# EAGLE board Nano Wearable (EAGLE 5.11)
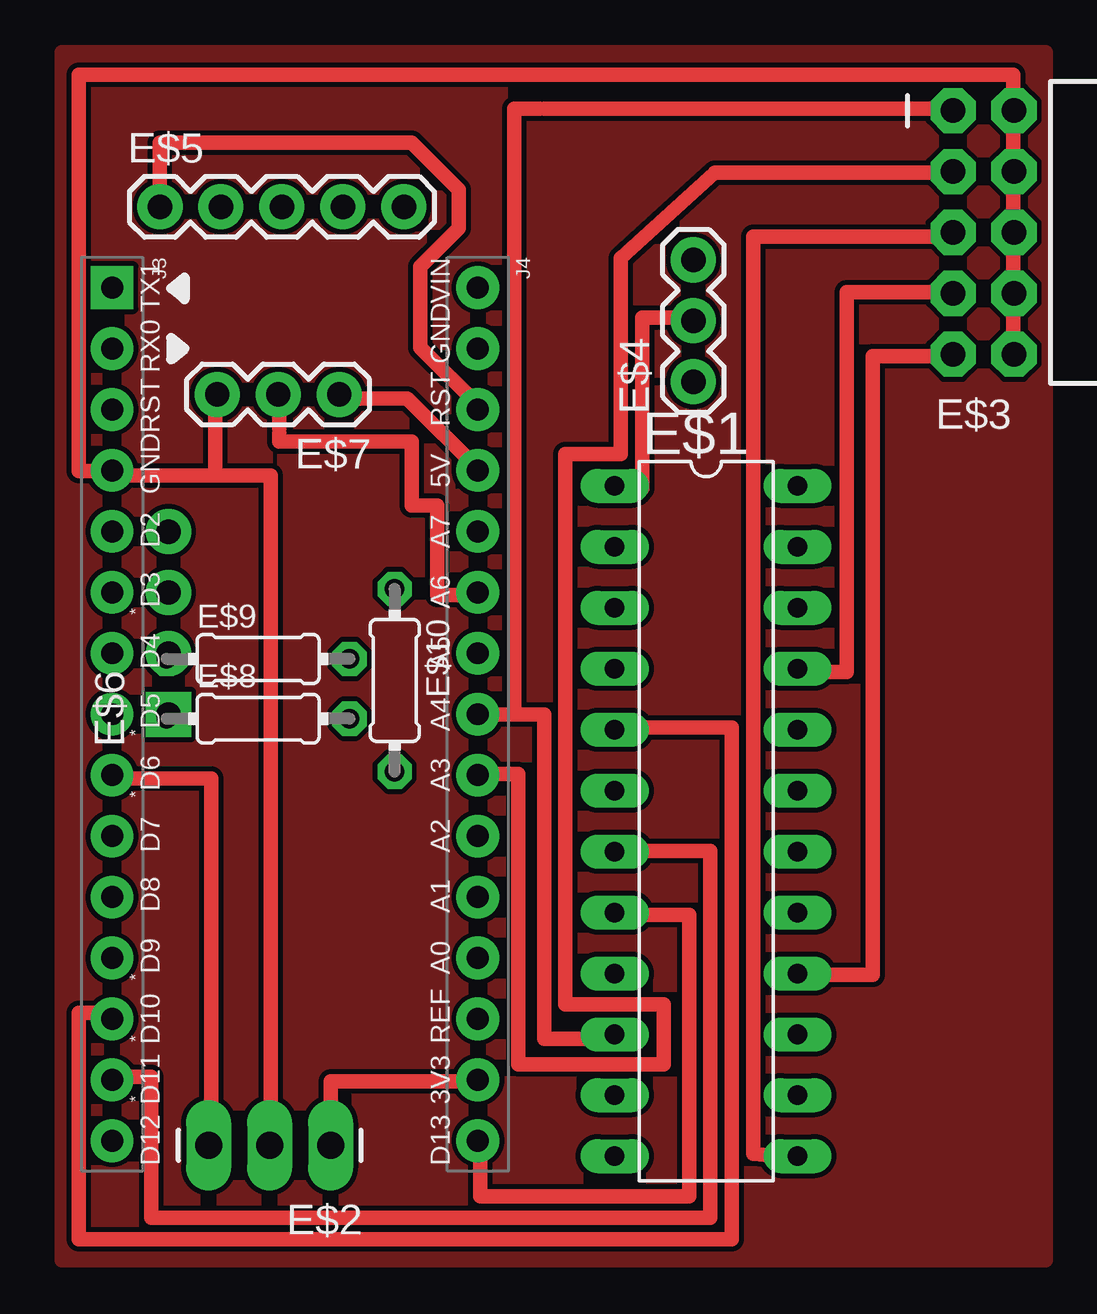
[diagram p0: board, top side]
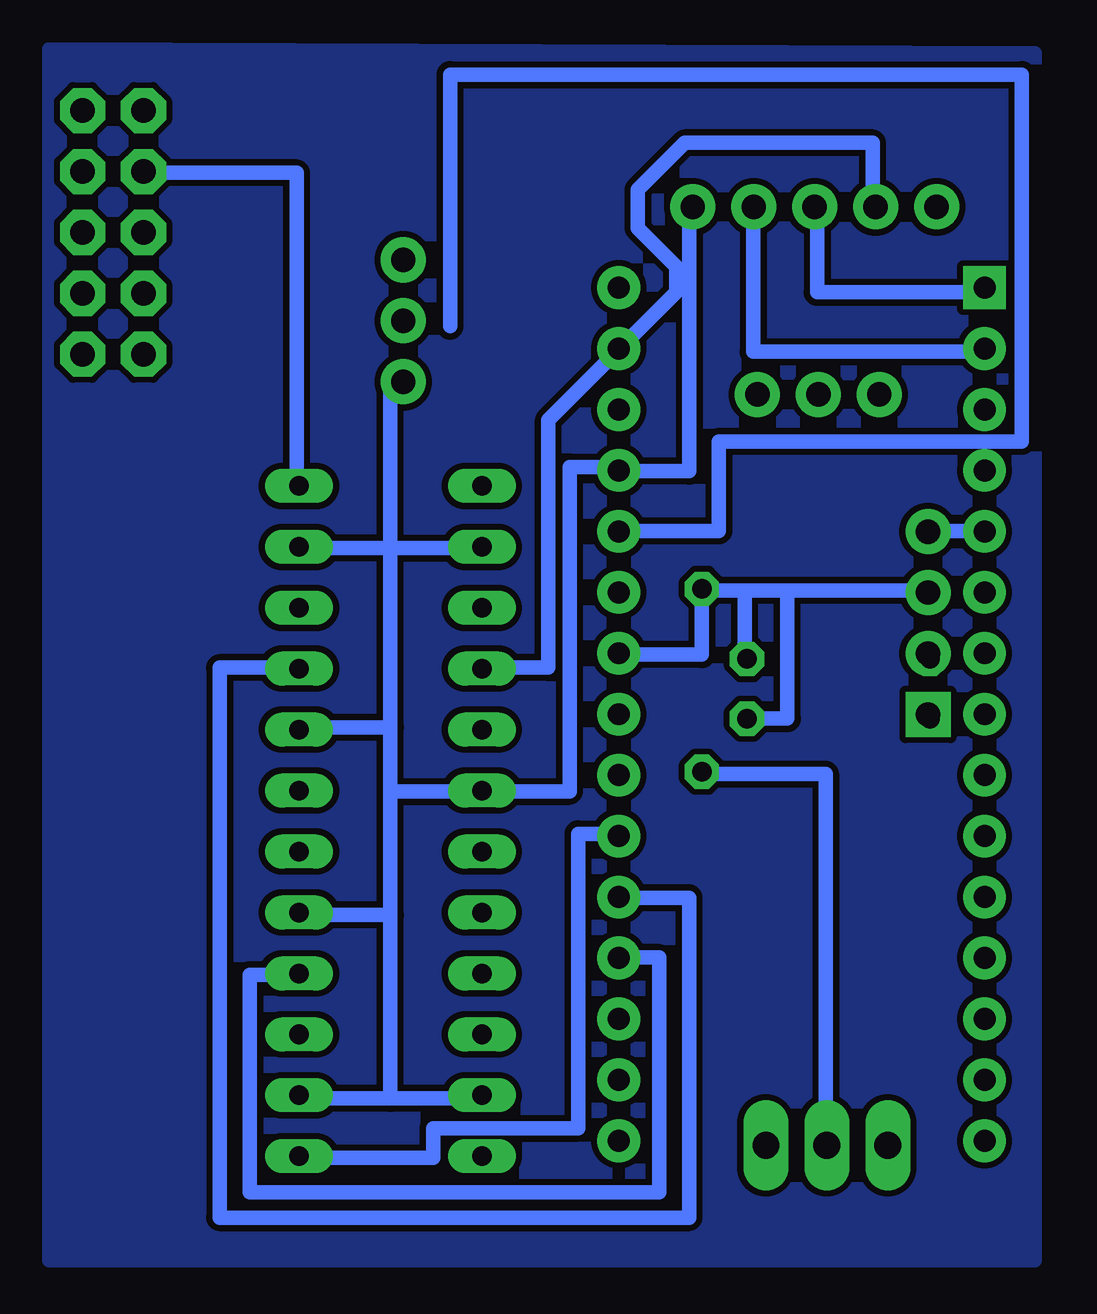
[diagram p1: board, bottom side, seen from below]

No outline drawn. Coordinates in mm, seen from the top.
Copper layers (1*16): Top 0.035mm / dielectric 1.5mm / Bottom 0.035mm
Design rules "default *": minimum track width 8mil, minimum drill 16mil, track to track 8mil, track to pad 8mil, pad to pad 8mil, via to via 8mil, smd to smd 8mil, copper to edge 8mil, drill to drill 8mil, minimum pad ring 12mil, minimum via ring 8mil, stop-mask expansion 4mil, vias tented up to drill 18mil, thermal gap 10mil

## Footprints (pad centres in the part's own frame; a part is rotated, then mirrored left to right if it is on the bottom)
DIL24-3 = drill 0.813 long: 1 -13.97,-3.81; 2 -11.43,-3.81; 3 -8.89,-3.81; 4 -6.35,-3.81; 5 -3.81,-3.81; 6 -1.27,-3.81; 7 1.27,-3.81; 8 3.81,-3.81; 9 6.35,-3.81; 10 8.89,-3.81; 11 11.43,-3.81; 12 13.97,-3.81; 13 13.97,3.81; 14 11.43,3.81; 15 8.89,3.81; 16 6.35,3.81; 17 3.81,3.81; 18 1.27,3.81; 19 -1.27,3.81; 20 -3.81,3.81; 21 -6.35,3.81; 22 -8.89,3.81; 23 -11.43,3.81; 24 -13.97,3.81
1X03_LONGPADS = drill 1.118 pad 1.88 long: 1 0,0; 2 2.54,0; 3 5.08,0
2X5-RA = drill 1.016 pad 1.88 octagon: 1 -1.27,5.08; 2 1.27,5.08; 3 -1.27,2.54; 4 1.27,2.54; 5 -1.27,0; 6 1.27,0; 7 -1.27,-2.54; 8 1.27,-2.54; 9 -1.27,-5.08; 10 1.27,-5.08
1X03 = drill 1.016 pad 1.88 round: 1 0,0; 2 2.54,0; 3 5.08,0
1X05 = drill 1.016 pad 1.88 round: 1 0,0; 2 2.54,0; 3 5.08,0; 4 7.62,0; 5 10.16,0
1X04_NO_SILK = drill 1.016 pad 1.88 square: 1 0,0 | drill 1.016 pad 1.88 round: 2 2.54,0; 3 5.08,0; 4 7.62,0
0204/7 = drill 0.813 octagon: 1 -3.81,0; 2 3.81,0
HEAD15-NOSS = drill 0.914 pad 1.778 square: 1 0,0 | drill 0.914 pad 1.778 round: 2 2.54,0; 3 5.08,0; 4 7.62,0; 5 10.16,0; 6 12.7,0; 7 15.24,0; 8 17.78,0; 9 20.32,0; 10 22.86,0; 11 25.4,0; 12 27.94,0; 13 30.48,0; 14 33.02,0; 15 35.56,0
HEAD15-NOSS-1 = drill 0.914 pad 1.778 round: 1 0,0; 2 2.54,0; 3 5.08,0; 4 7.62,0; 5 10.16,0; 6 12.7,0; 7 15.24,0; 8 17.78,0; 9 20.32,0; 10 22.86,0; 11 25.4,0; 12 27.94,0; 13 30.48,0; 14 33.02,0; 15 35.56,0

## Placement (x,y rotation side)
E$1  [DIL24-3]  26.85,17.96 270 top
E$2  [1X03_LONGPADS]  11.2,4.45 180 top
E$3  [2X5-RA]  38.4,42.49 0 top
E$4  [1X03]  26.31,36.27 90 top
E$5  [1X05]  4.09,43.56 0 top
E$6  [1X04_NO_SILK]  4.45,22.4 90 top
E$7  [1X03]  11.56,35.74 180 top
E$8  [0204/7]  8.18,22.23 0 top
E$9  [0204/7]  8.18,24.71 0 top
E$10  [0204/7]  13.87,23.83 270 top
J3  HEAD15-NOSS  [HEAD15-NOSS]  2.09,40.19 270 top
J4  HEAD15-NOSS-1  [HEAD15-NOSS-1]  17.33,40.19 270 top

## Library data of the parts
E$1 = analog-devices
E$2-E$7 = SparkFun
E$8-E$10 = rcl
J3 J4 = MyCON2

## Nets
S$1: E$4.1
S$22: E$5.1

## Tracks (layer width: path | path; a pad name or v marks a point on that pad's centre or on a via)
S$1
  Bottom 0.61: 26.85,29.34 30.76,29.34 | 26.85,29.34 23.11,29.34 | 26.85,21.87 30.76,21.87 | 26.85,21.87 26.85,29.16 26.85,29.34 | 26.85,14.05 30.58,14.05 | 26.85,14.05 26.85,21.87 | 26.85,6.4 30.76,6.4 | 26.85,6.4 26.85,14.05 | 23.11,6.4 26.85,6.4 | 26.85,29.34 26.85,36.27 E$4.1
S$2
  Top 0.61: 37.16,44.98 27.2,44.98 23.29,41.43 23.29,33.25 20.98,33.25 20.98,10.31 25.07,10.31 25.07,7.82 19.02,7.82 19.02,19.91 17.42,19.91
S$3
  Bottom 0.61: 26.67,19.2 19.38,19.2 19.38,32.72 17.42,32.72 17.42,32.54 14.4,32.54 14.4,43.74
S$4
  Top 0.61: 23.11,21.87 27.91,21.87 27.91,0.53 0.71,0.53 0.71,9.96 2.13,9.96 2.13,9.78
S$5
  Top 0.61: 23.11,16.71 27.03,16.71 27.03,1.42 3.73,1.42 3.73,7.29 2.13,7.29 2.13,7.11
S$6
  Top 0.61: 23.11,14.05 26.14,14.05 26.14,2.31 17.42,2.31 17.42,4.62
S$7
  Top 0.61: 30.58,11.56 33.78,11.56 33.78,37.34 37.16,37.34
S$8
  Top 0.61: 30.76,24.18 32.72,24.18 32.72,40.01 37.16,40.01 37.16,39.83
S$9
  Top 0.61: 30.58,3.91 28.8,4.09 28.8,42.32 37.16,42.32 37.16,42.49
S$10
  Bottom 0.61: 30.76,32 30.76,44.98 37.16,44.98
S$11
  Top 0.61: 18.85,22.4 20.09,22.4 20.09,8.89 23.11,8.89 | 18.85,22.4 17.42,22.4 | 19.91,47.65 18.85,47.65 18.85,22.4
S$12
  Bottom 0.61: 24.36,38.58 24.36,49.07 0.53,49.07 0.53,33.78 13.16,33.78 13.16,30.05 17.42,30.05
S$13
  Bottom 0.61: 30.58,11.56 32.72,11.56 32.72,2.49 15.65,2.49 15.65,12.27 17.42,12.27
S$14
  Bottom 0.61: 30.58,24.36 33.96,24.36 33.96,1.42 14.4,1.42 14.4,14.76 17.42,14.76 17.42,14.94
S$15
  Bottom 0.61: 30.58,3.91 25.07,3.91 25.07,5.16 19.02,5.16 19.02,17.42 17.25,17.42 17.25,17.25
S$16
  Top 0.61: 11.73,35.56 14.4,35.56 17.42,32.54
S$17
  Top 0.61: 8.71,4.62 8.71,32.36 6.4,32.36 | 2.13,32.36 6.4,32.36 | 6.4,32.36 6.4,35.56
S$18
  Top 0.61: 6.22,4.45 6.22,19.74 2.13,19.74
S$19
  Top 0.61: 17.42,7.11 11.2,7.11 11.2,4.27
S$20
  Bottom 0.61: 11.73,43.56 11.73,37.52 2.13,37.52
S$21
  Bottom 0.61: 9.07,43.74 9.07,40.01 2.31,40.01
S$22
  Top 0.61: E$5.1 4.09,46.23 14.58,46.23 16.54,44.27 16.54,42.67 14.94,41.07 14.94,37.69 17.42,35.2
S$23
  Bottom 0.61: 4.45,30.05 1.96,30.05
S$24
  Top 0.61: 23.11,31.83 24.18,31.83 24.18,38.94 26.31,38.94
S$25
  Top 0.61: 39.65,37.34 39.65,49.07 0.71,49.07 0.71,32.54 2.13,32.54
S$26
  Top 0.61: 9.07,34.31 9.07,35.74
S$27
  Top 0.61: 20.09,47.65 37.34,47.65
S$28
  Bottom 0.61: 23.11,24.36 20.27,24.36 20.27,34.67 17.42,37.52 | 17.42,37.52 17.42,37.69 | 17.42,37.52 14.94,40.01 14.94,41.07 16.54,42.67 16.54,44.27 14.58,46.23 6.76,46.23 6.76,43.2
S$29
  Top 0.61: 9.07,34.14 9.07,33.78 14.58,33.78 14.58,31.11 15.65,31.11 15.65,27.38 17.42,27.38 17.42,27.56
S$30
  Bottom 0.61: 4.45,27.56 12.09,27.56 | 17.42,24.89 13.87,24.89 13.87,27.56 12.09,27.56 | 12.09,24.54 12.09,27.56
S$31
  Bottom 0.61: 11.91,22.23 10.31,22.23 10.31,27.38
S$32
  Bottom 0.61: 13.87,19.91 8.71,19.91 8.71,4.09
S$44
  pour Top: 0,-0.36 41,-0.36 41,50 0,50
S$88
  pour Bottom (isolate 0.254, rank 2): 0,49.96 41.07,50.14 41.07,-0.36 0,-0.36

## Text on the board
tPlace: VIN | TX1 | RX0 | GND | RST | RST | GND | 5V | D2 | A7 | * | D3 | A6 | D4 | A5 | D5 | A4 | * | * | D6 | A3 | D7 | A2 | D8 | A1 | D9 | A0 | * | * | D10 | REF | * | D11 | 3V3 | D12 | D13